# Altium PCB TRACER_GBOX.PcbDoc
Units mil, origin at the board's own origin, x right, y up, seen from the top; angles counter-clockwise.
Board outline 2854.33 x 3149.61 mil, 6 copper layers (Top Layer, Mid-Layer 1, Mid-Layer 2, VCC, GND, Bottom Layer), stack 58.634 mil thick; 1 components, 62 nets, 13 pads, 0 vias.
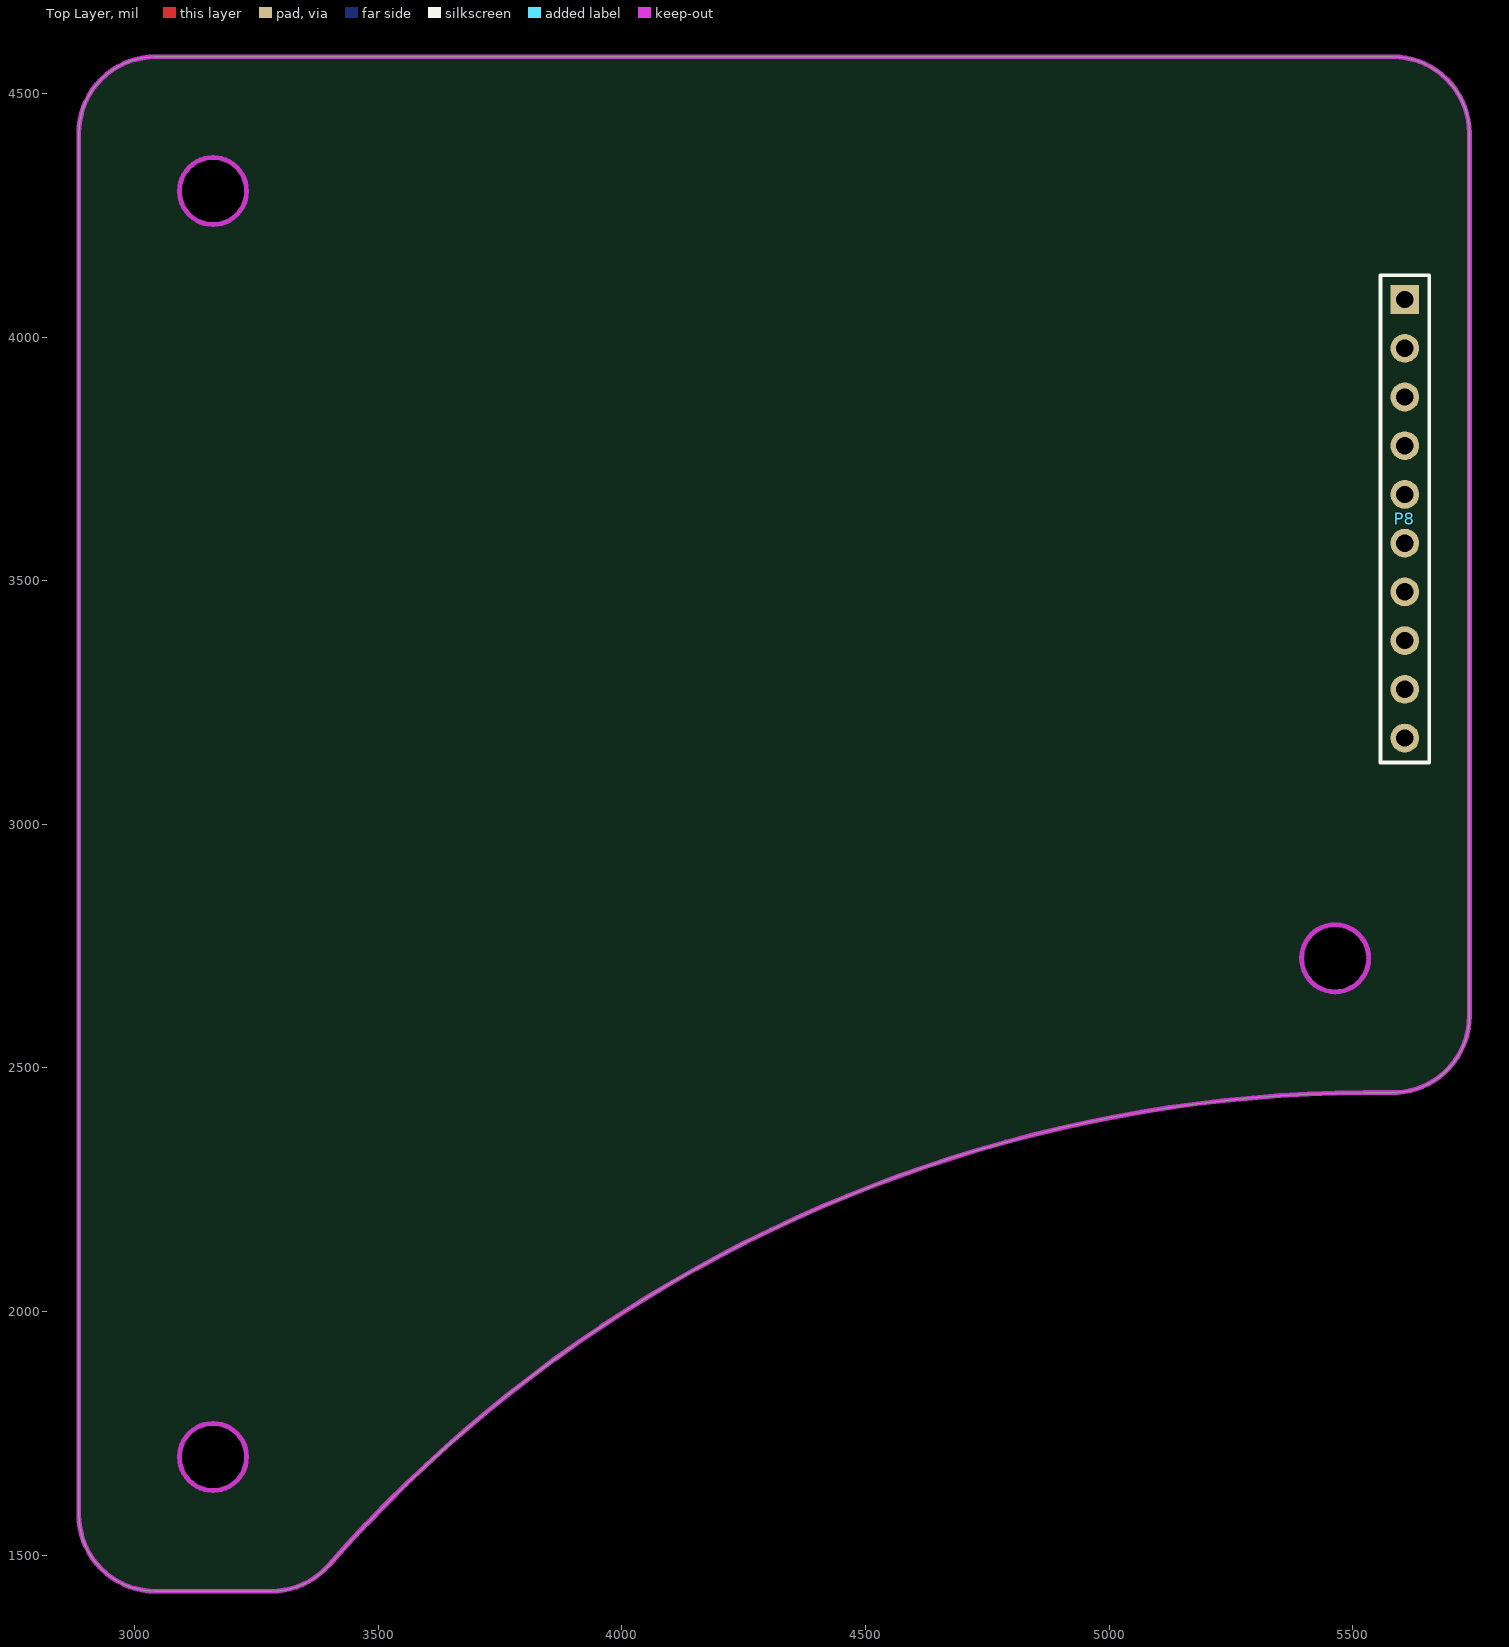
[diagram p0: Top Layer view]
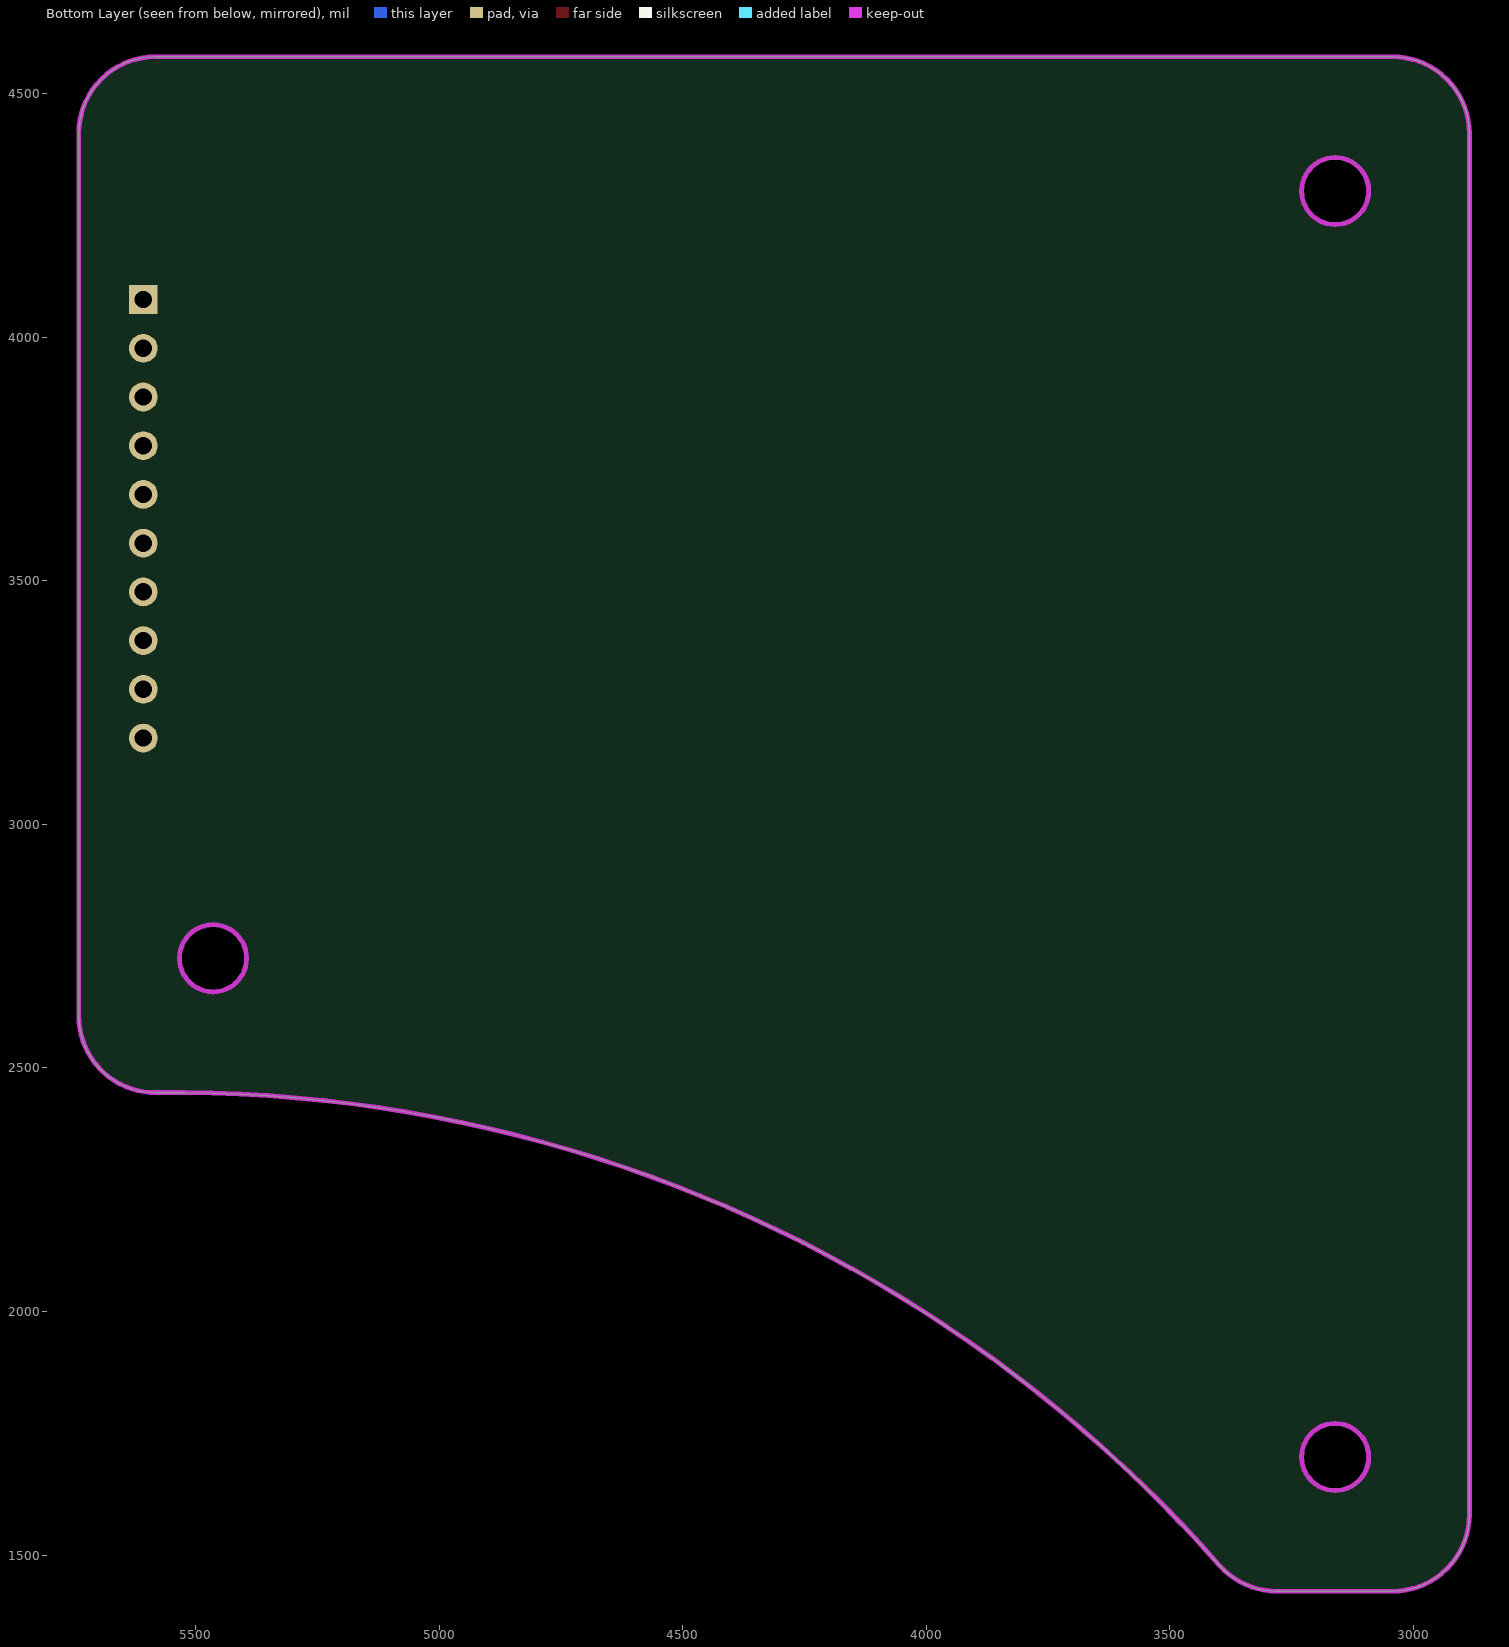
[diagram p1: Bottom Layer view, seen from below]
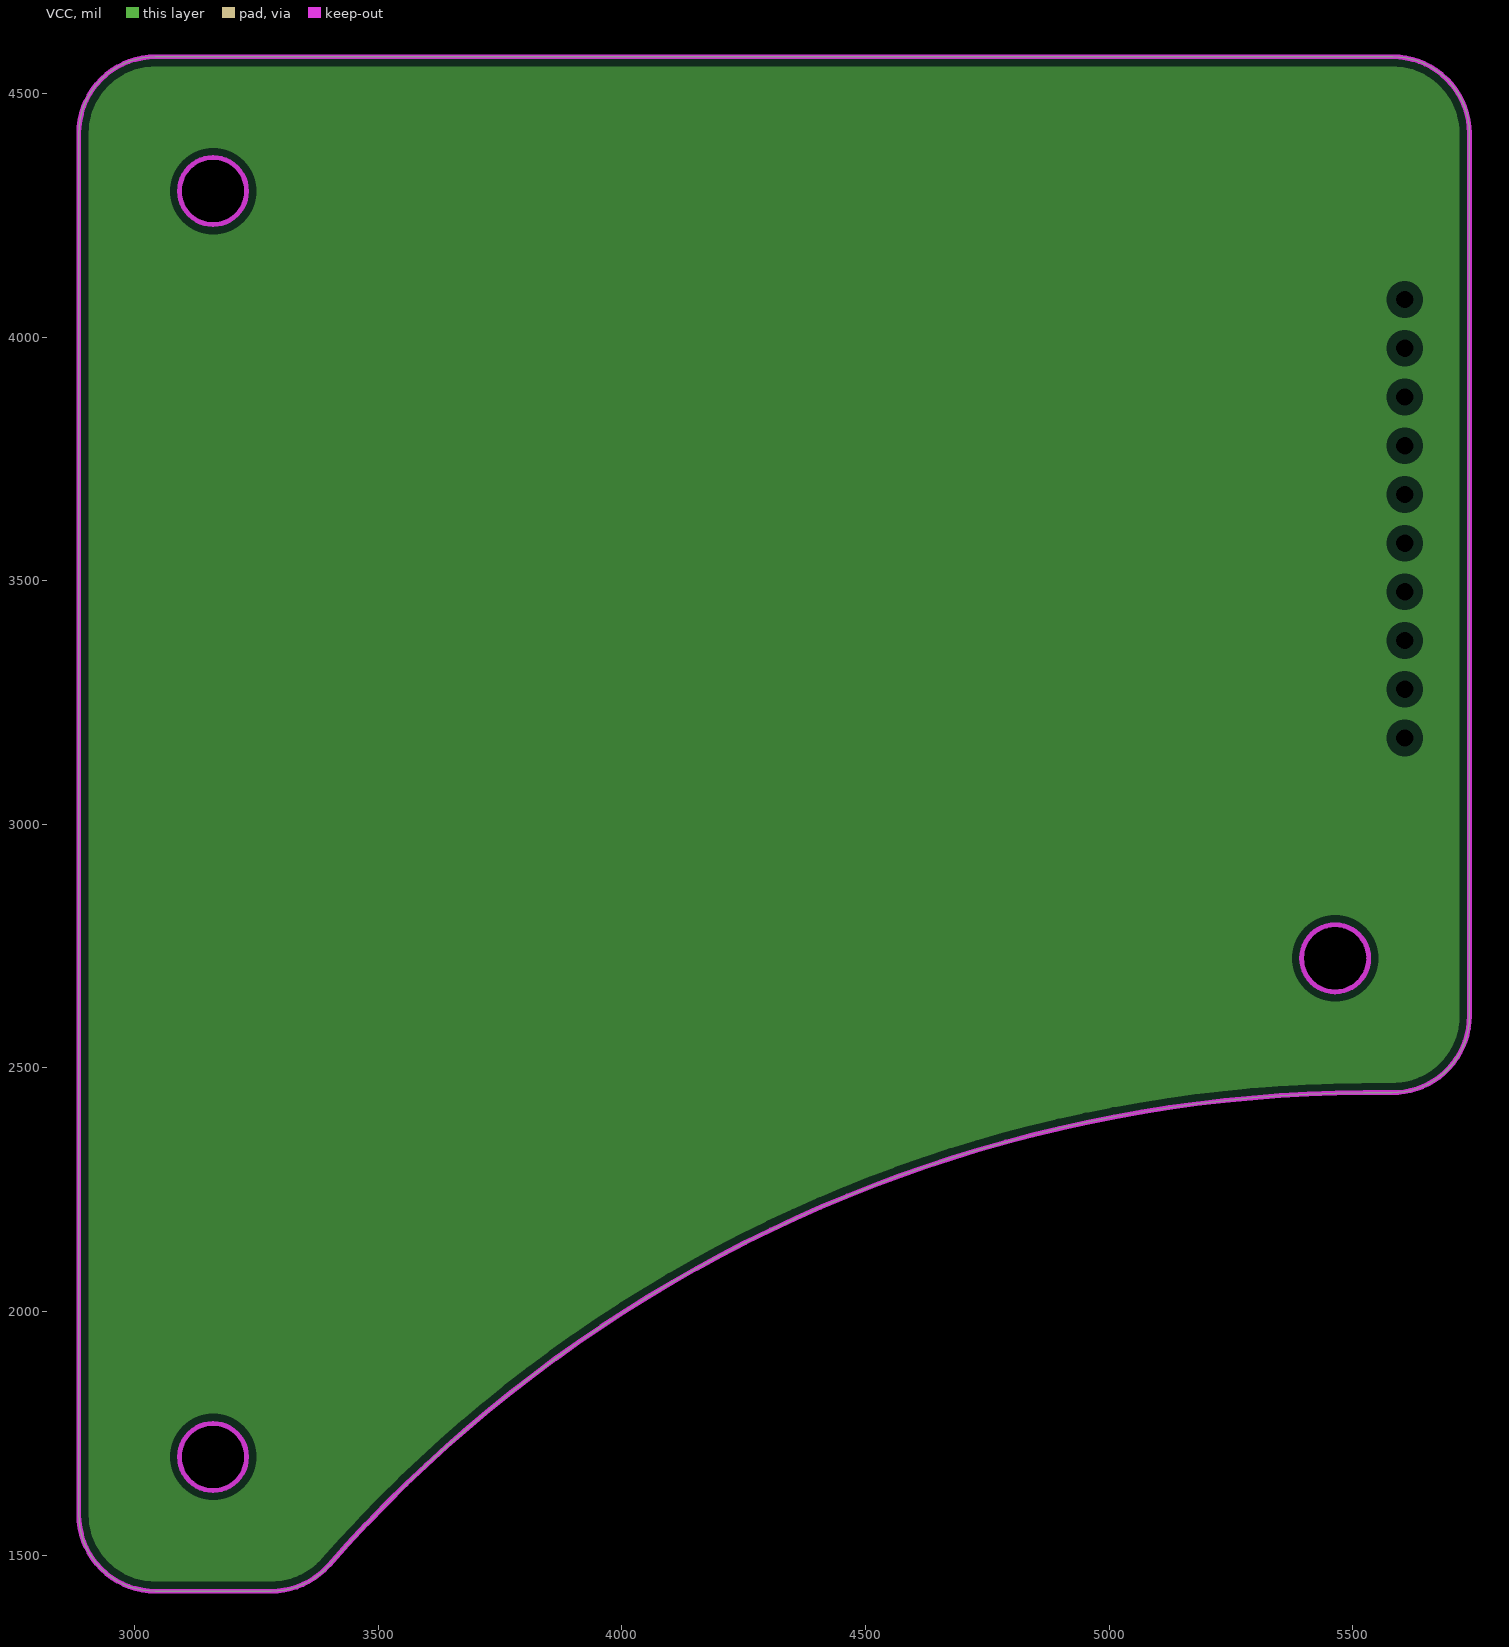
[diagram p2: VCC, clearances drawn from the general rule]
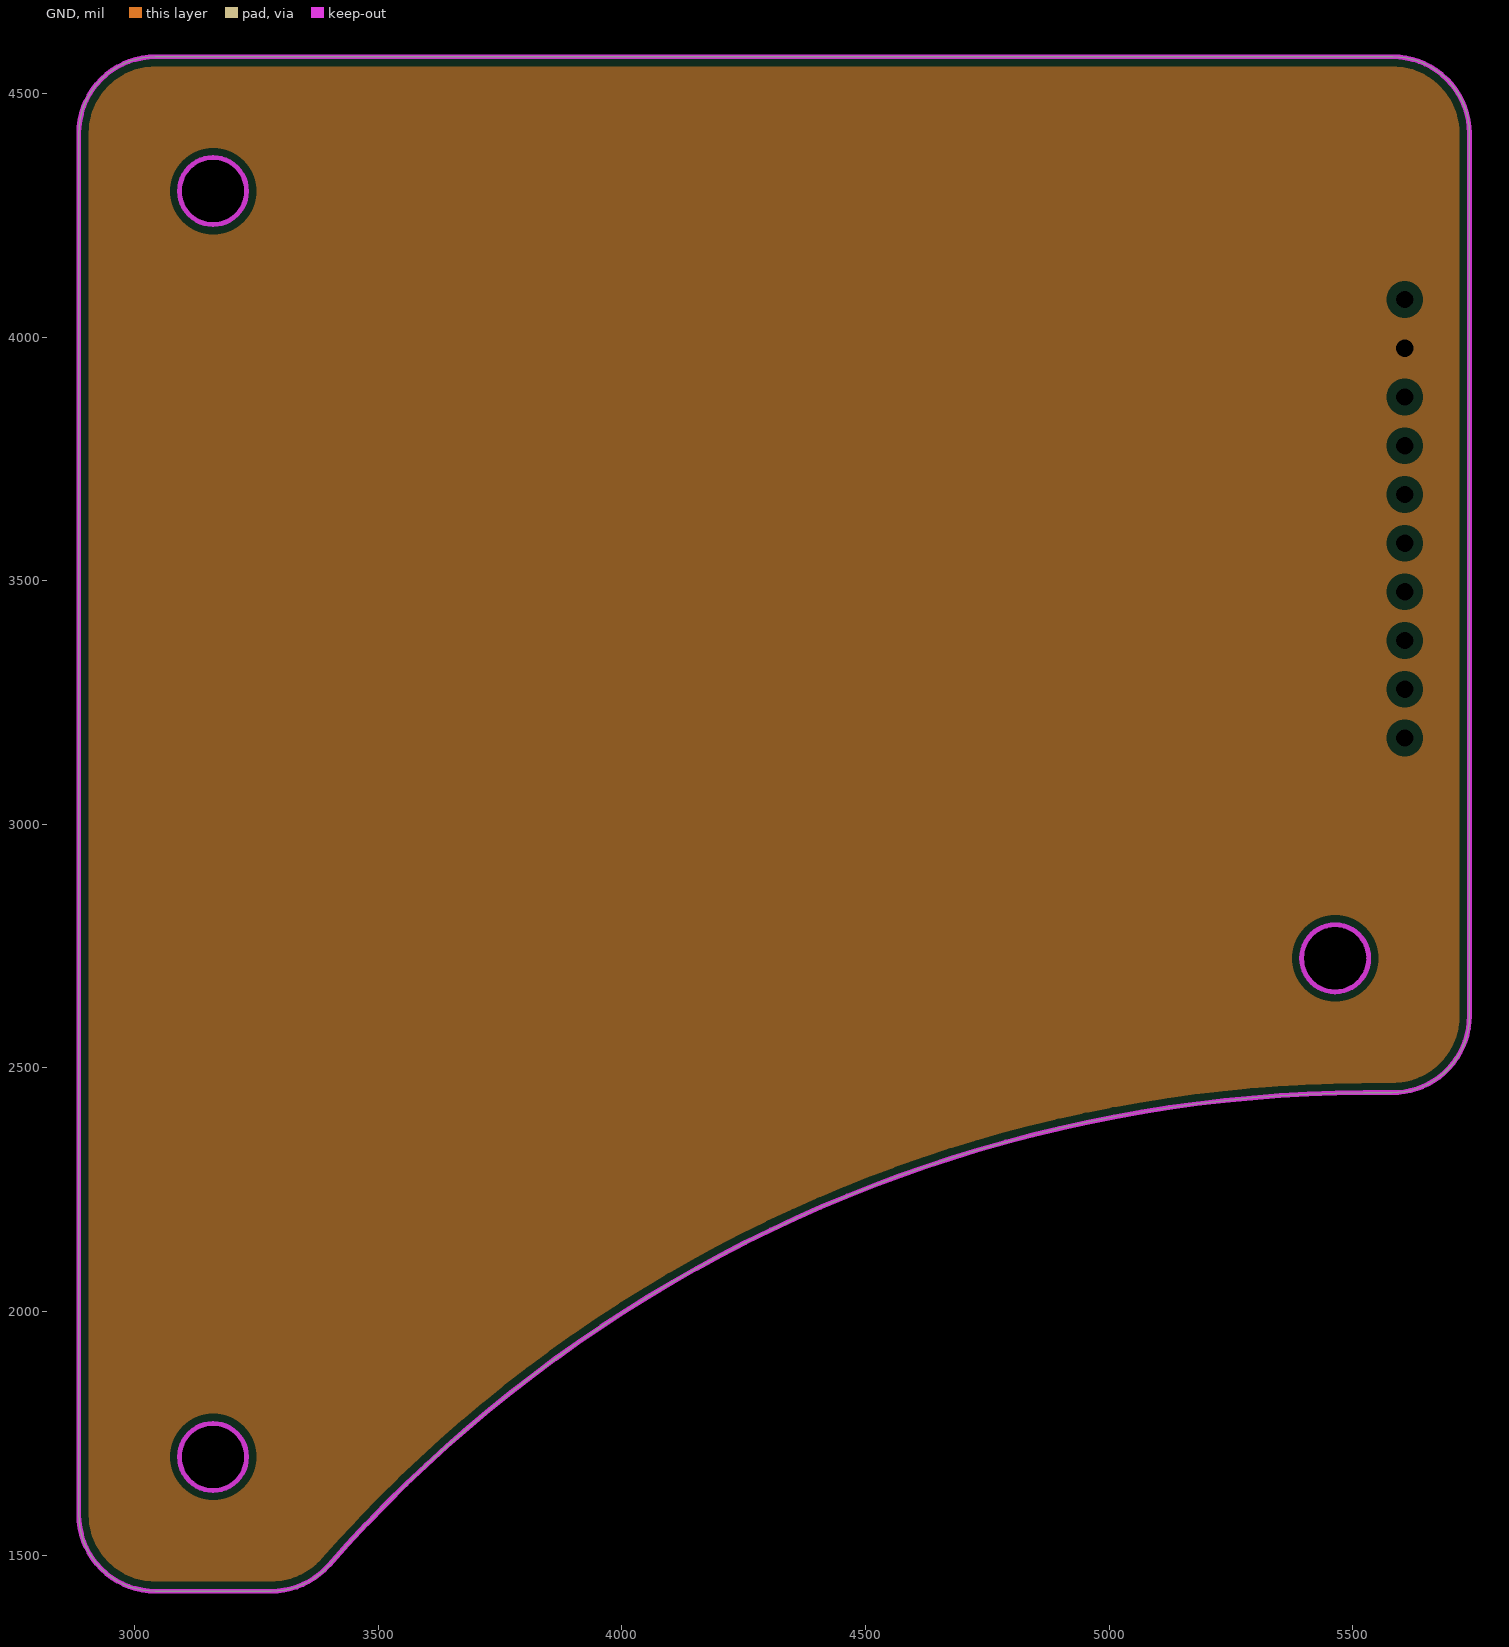
[diagram p3: GND, clearances drawn from the general rule]

## Layer stack, top to bottom
Top Solder: solder mask 0.4, Solder Resist, Dk 3.5
Top Layer: signal copper 1.4
Dielectric 1: core 10, FR-4, Dk 4.2
Mid-Layer 1: signal copper 1.4
Dielectric4: dielectric 12.6, FR-4, Dk 4.8
Mid-Layer 2: signal copper 1.4
Dielectric5: dielectric 12.6, FR-4, Dk 4.8
VCC: plane copper 1.417, net VCC_+2.8V
Dielectric 3: prepreg 5, Dk 4.2
GND: plane copper 1.417, net GND
Dielectric 2: core 10, Dk 4.2
Bottom Layer: signal copper 1.4
Bottom Solder: solder mask 0.4, Solder Resist, Dk 3.5

## Board outline
2885.21,1583.22 ccw(c3042.69,1583.22) 3042.69,1425.73 3280.36,1425.73 ccw(c3280.36,1583.22) 3398.65,1479.26 cw(c5542.69,-404.97) 5580,2449.11 ccw(c5582.06,2606.58) 5739.54,2606.58 5739.54,4417.86 ccw(c5582.06,4417.86) 5582.06,4575.34 3042.69,4575.34 ccw(c3042.69,4417.86) 2885.21,4417.86

## Design rules (kind name [scope] priority, off if disabled: settings)
Clearance [All] p1: gap=6
ComponentClearance [All] p1: gap=0 collisioncheckmode=3 verticalgap=0 showdistances=FALSE
HoleSize [All] p1: absolutevalues=TRUE maxlimit=500 minlimit=1 maxpercent=80.000 minpercent=20.000
HoleToHoleClearance [All] p1: gap=0 allowstackedmicrovias=TRUE
MinimumSolderMaskSliver [All] p1: minsoldermaskwidth=0
PlaneClearance [All] p1: clearance=20
PlaneConnect [All] p1: planeconnectstyle=Direct reliefexpansion=20 reliefentries=4 reliefconductorwidth=10 reliefairgap=10
PolygonConnect PolygonConnect_1 [IsVia vs InNet('GND')] p1 off: connectstyle=Direct reliefconductorwidth=10 reliefentries=4 polygonreliefangle="90 Angle" airgapwidth=10
PolygonConnect PolygonConnect_2 [All] p2: connectstyle=Direct reliefconductorwidth=10 reliefentries=4 polygonreliefangle="90 Angle" airgapwidth=10
RoutingLayers [All] p1: top layer_v5=TRUE mid layer 1_v5=FALSE mid layer 2_v5=FALSE bottom layer_v5=TRUE
RoutingVias [All] p1: holewidth=28 width=50 viastyle="Through Hole" minholewidth=28 minwidth=50 maxholewidth=28 maxwidth=50
SilkToSilkClearance [All] p1: silktosilkclearance=0
SilkToSolderMaskClearance [IsPad] p1: minsilkscreentomaskgap=0 clearancetoexposedcopper=TRUE
SolderMaskExpansion [All] p1: expansion=4
Width [All] p1: maxlimit=300 minlimit=6 preferedwidth=8
21 further rules are at their usual default settings.

## Components (designator, comment, footprint, x,y, rotation, side; value= is the part's Value field where it differs from the comment)
P8 "Header 10" HDR1X10 5607,4077 r270 top locked

## Footprints (in the part's own frame and the unit in brackets; to place one, negate y for a bottom-side part, rotate by r counter-clockwise, add the part's x,y. Pads: shape width x height; smd on the part's side, far side on the other; paste and mask are expansions set on the pad)
HDR1X10 [mm] "Connector; Header; 10 Position"
  rect 1.5x1.5 hole 0.9: 1(0,0)
  round 1.5 hole 0.9: 2(2.54,0) 3(5.08,0) 4(7.62,0) 5(10.16,0) 6(12.7,0) 7(15.24,0) 8(17.78,0) 9(20.32,0) 10(22.86,0)
  silkscreen extent -1.27,-1.27 24.13,1.27

## Part data
P8: "Header, 10-Pin"

## Free pads (board coordinates)
  round 137.8 hole 137.8: 2(3161,1702) 2(3161,4299) 2(5464,2725)

## Nets (pads, with @x,y where several pads share a name; then routed paths per layer and width w, separated by ;. In a path a pad name is that pad's centre, name@x,y a point inside that pad or via, vN(x,y) a via of type N, cw(c..) or ccw(c..) an arc to the next point about the centre after c; other vN are vias at no path point)
BEEP_PWM: P8.10
BEEP_PWR: P8.9
GND: P8.2
LED1: 
LED2: 
LED3: 
MOTOR_CON: P8.8
NetANT1_1: 
NetC1_2: 
NetC16_1: 
NetC18_1: 
NetC22_1: 
NetC23_1: 
NetC25_1: 
NetC25_2: 
NetC29_1: 
NetC30_1: 
NetD2_2: 
NetL2_1: 
NetL2_2: 
NetL2_3: 
NetL4_1: 
NetLED1_1: 
NetLED1_2: 
NetLED2_1: 
NetLED3_1: 
NetLED4_1: 
NetQ2_3: 
NetQ3_2: 
NetR1_1: 
NetR1_2: 
NetR4_1: 
NetR5_1: 
NetR7_1: 
NetR13_1: 
NetR14_2: 
NetR17_1: 
NetU2_6: 
P0.01: 
P0.03: 
P0.07: 
P0.08: 
P0.09: 
P0.10: 
P0.13: 
P0.23: P8.7
P0.24: P8.6
P0.25: P8.5
P0.28: 
P0.30: 
SWCLK: 
SWDIO: 
UART_RX: P8.3
UART_TX: P8.4
UI+: 
UI-: 
V_SOLAR: 
VBAT: P8.1
VCC_+2.8V: 
VREF+2.5V: 
XL1: 
XL2: 

## Polygon pours and split planes (outlines as drawn)
VCC_+2.8V on VCC (split plane): 3383.62,1492.47 3383.6,1492.49
VCC_+2.8V on VCC (split plane): 173 vertices, not listed, extent 2905.24,1445.77 5719.5,4555.31
GND on GND (split plane): 3383.62,1492.47 3383.6,1492.49
GND on GND (split plane): 173 vertices, not listed, extent 2905.24,1445.77 5719.5,4555.31

## Keep-outs
Keep-Out Layer:
  circle w10: c5463.95,2724.95 r68.9
  circle w10: c3160.8,1701.33 r68.9
  circle w10: c3160.8,4299.75 r68.9
  lines w10: 0.25,11693.16 0.25,0.25 16535.68,0.25 ; 2885.21,1583.22 ccw(c3042.69,1583.22) 3042.69,1425.74 3280.36,1425.73 ccw(c3280.36,1583.22) 3398.65,1479.26 cw(c5542.69,-404.97) 5580,2449.11 ccw(c5582.06,2606.58) 5739.54,2606.58 5739.54,4417.86 ccw(c5582.06,4417.86) 5582.06,4575.34 3042.69,4575.34 ccw(c3042.69,4417.86) 2885.21,4417.86 2885.21,1583.22